# Altium PCB DEV-5V-Outside-Pump_2024-11-25.pcbdoc
Units mil, origin at the board's own origin, x right, y up, seen from the top; angles counter-clockwise.
Board outline 3260 x 4880 mil, 2 copper layers (Top Layer, Bottom Layer); 59 components, 45 nets, 268 pads, 27 vias.
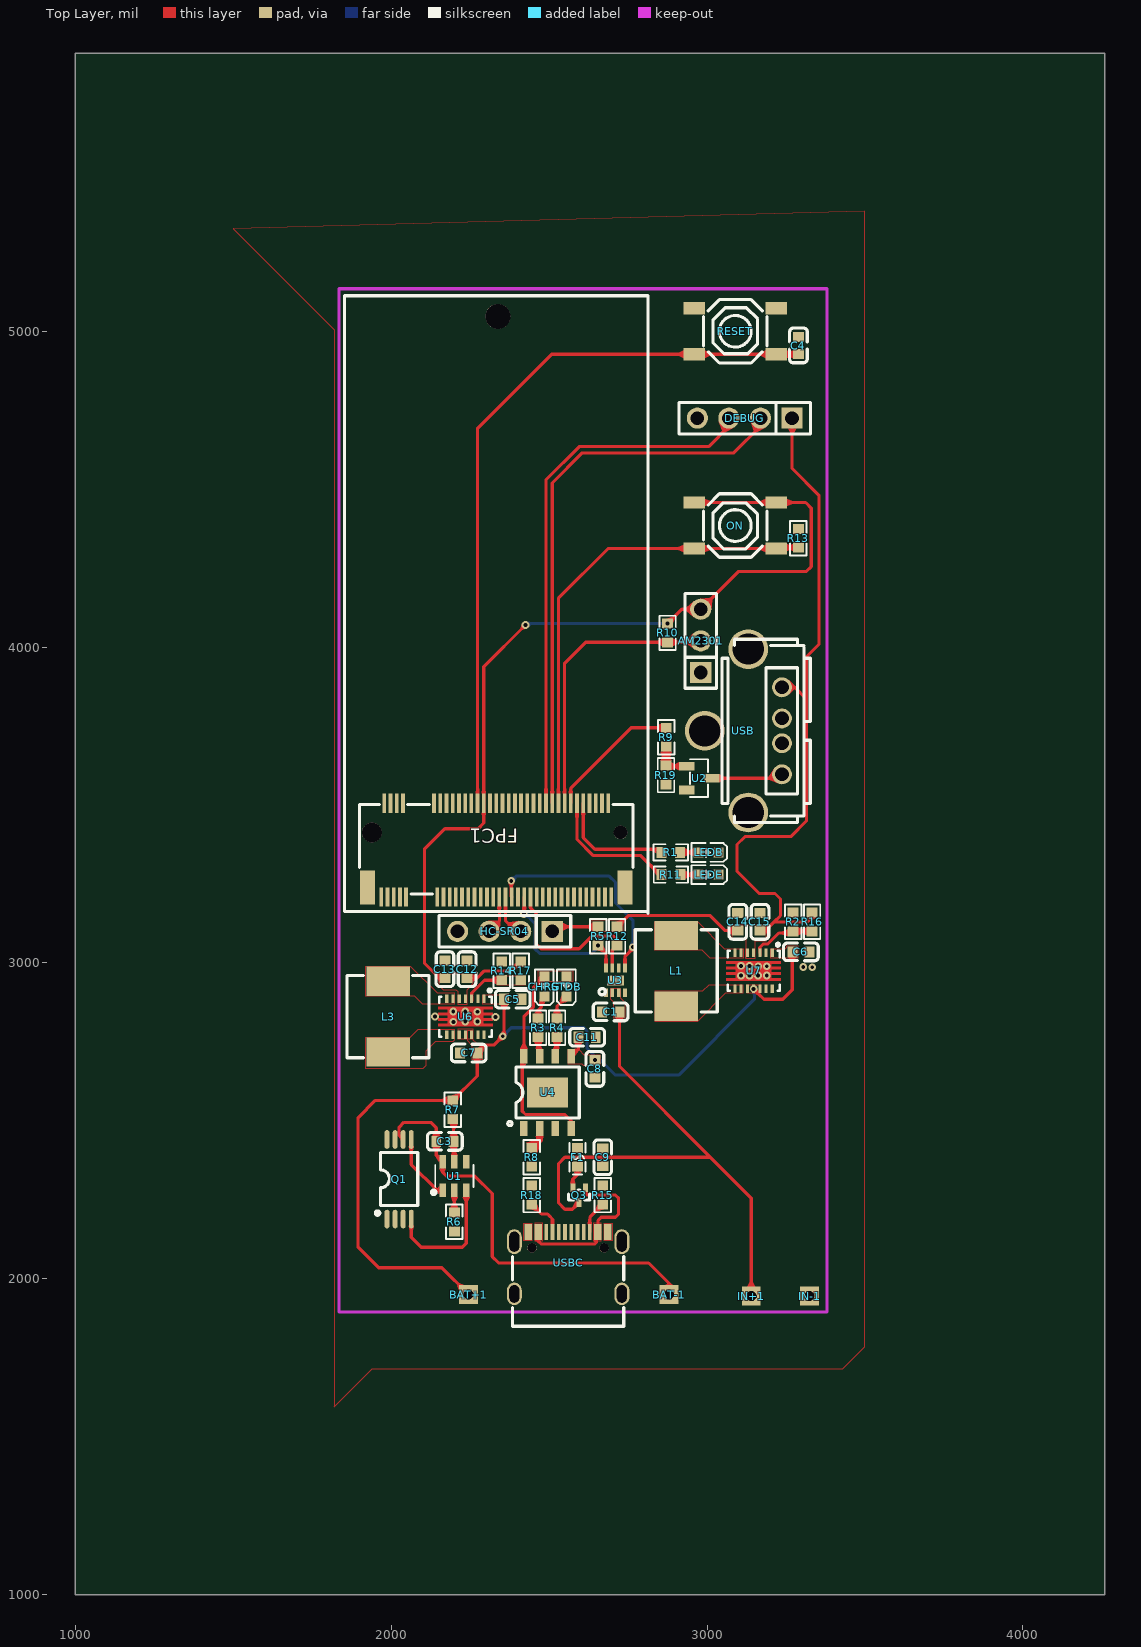
[diagram p0: Top Layer view]
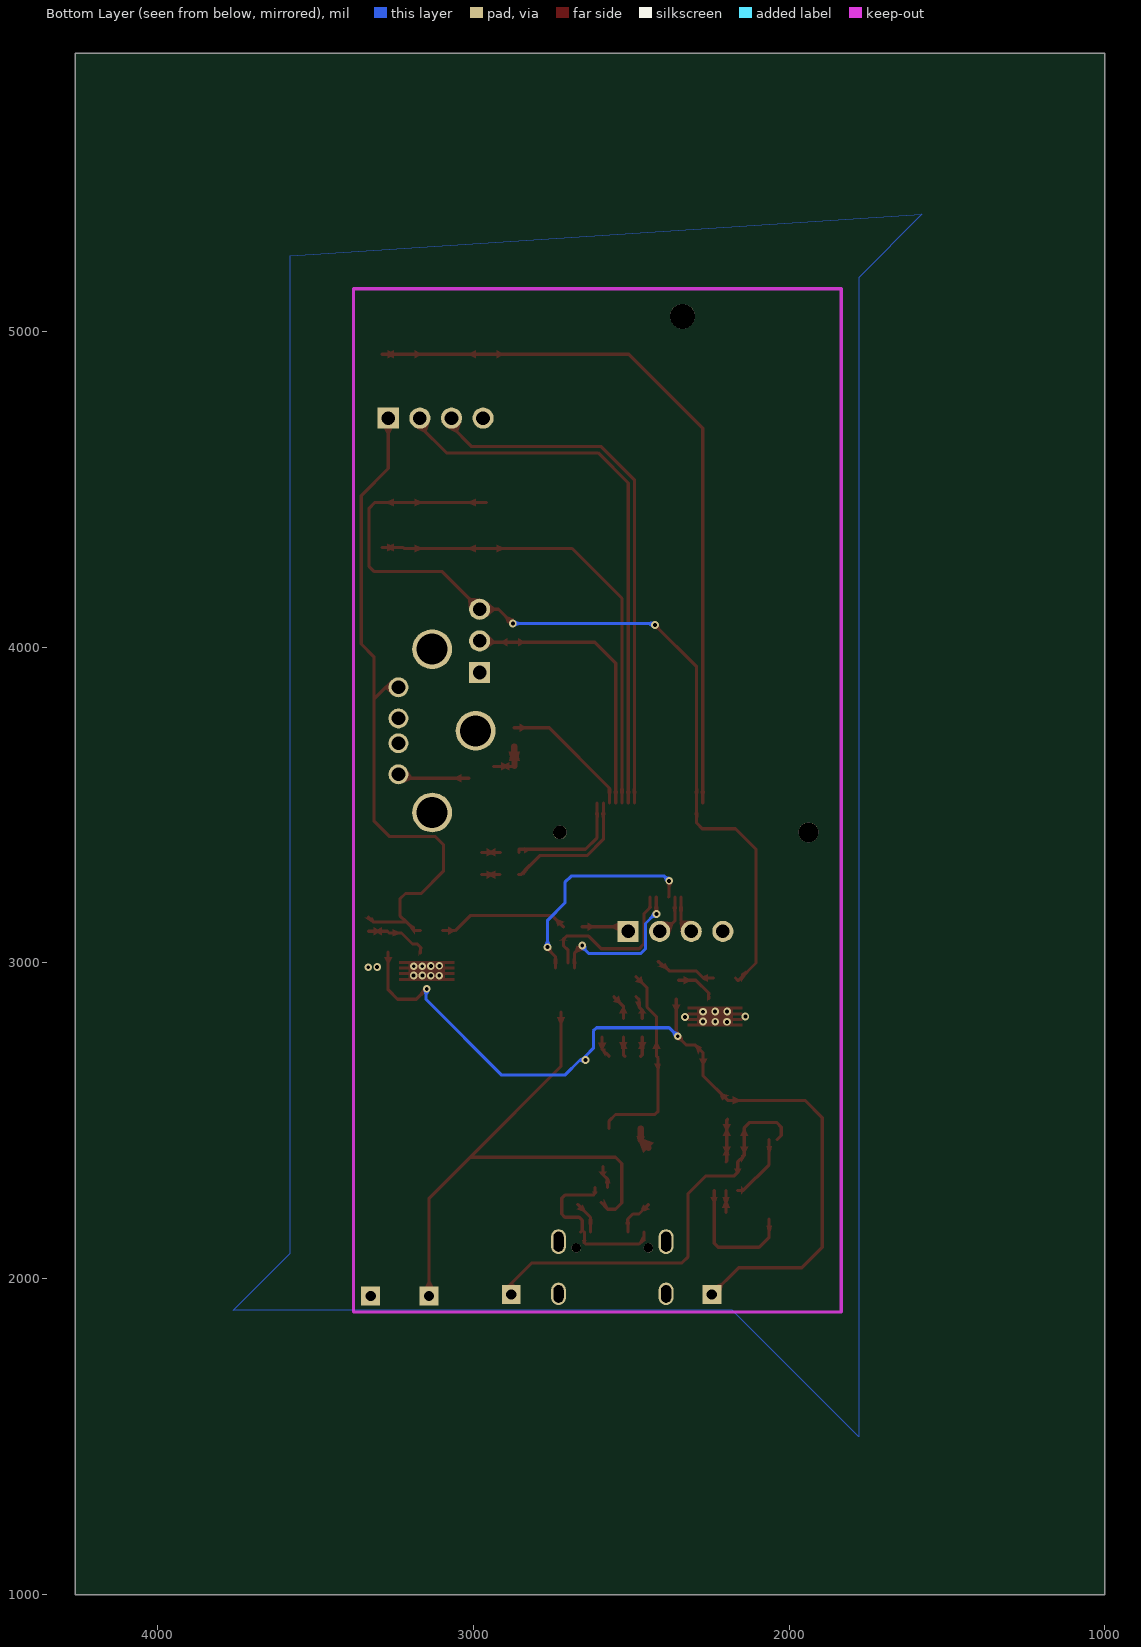
[diagram p1: Bottom Layer view, seen from below]

## Layer stack, top to bottom
Top Layer: signal copper (thickness not stored)
Dielectric: dielectric 12.6, FR-4, Dk 4.8
Bottom Layer: signal copper (thickness not stored)

## Board outline
4260,1000 1000,1000 1000,5880 4260,5880

## Components (designator, comment, footprint, x,y, rotation, side; value= is the part's Value field where it differs from the comment)
AM2301 "1125" CONN-TH_1125-1103S0S113CR01 2980,4020 r90 top
BAT+1 "Pad 04" CON_PAD_SQUARE_32MIL 2245,1950 r0 top
BAT-1 "Pad 05" CON_PAD_SQUARE_32MIL 2880,1950 r0 top
C1 "100n" C0603 2695,2845 r0 top
C3 "100n" C0603 2170,2435 r0 top
C4 "100n" C0603 3289.27,4955.11 r270 top
C5 "100n" C0603 2385,2885 r0 top
C6 "100n" C0603 3297.5,3035 r0 top
C7 "10u" C0603 2245,2715 r180 top
C8 "10u" C0603 2645,2665 r90 top
C9 "10u" C0603 2670,2385 r90 top
C11 "10uF" C0603 2620,2765 r180 top
C12 "22u" C0603 2240,2980 r270 top
C13 "22u" C0603 2170,2980 r270 top
C14 "22u" C0603 3097.5,3130 r270 top
C15 "22u" C0603 3167.5,3130 r270 top
CHRG "FC-DA1608BK-470H10" LED0603-RD 2485,2925 r90 top
DEBUG "2.54-1*4P母" HDR-TH_4P-P2.54-V-F 3119.27,4725.11 r180 top
F1 "1.25A" F0603 2590,2385 r90 top
FPC1 "AS0BC21-S30BM-7H" CONN-SMD_AS0BC21-S30BM-7H 2332.5,3357.5 r180 top
HC-SR04 "2.54-1*4P母" HDR-TH_4P-P2.54-V-F 2360,3100 r180 top
IN+1 "Pad 01" CON_PAD_SQUARE_32MIL 3140,1945 r0 top
IN-1 "Pad 02" CON_PAD_SQUARE_32MIL 3325,1945 r0 top
L1 "1.5u" IND-SMD_L7.2-W6.6_GPSR0730 2902.5,2975 r270 top
L3 "1.5uH" IND-SMD_L7.2-W6.6_GPSR0730 1990,2830 r270 top
LEDB "FC-DA1608BK-470H10" LED0603-RD 3005,3350 r180 top
LEDE "XL-1608UGC-04" LED0603-RD_GREEN 3005,3280 r180 top
ON "TS-1187A-B-A-B" SW-SMD_4P-L5.1-W5.1-P3.70-LS6.5-TL-2 3089.27,4385.11 r0 top
Q1 "FS8205A" TSSOP-8_L4.4-W3.5-P0.65-LS6.4-BL 2025,2315 r0 top
Q3 "NTA4151PT1G" SOT-416_L1.6-W0.8-P1.00-LS1.6-BR 2595,2265 r90 top
R1 "49.9" R0603 2885,3350 r180 top
R2 "180k" R0603 3272.5,3130 r270 top
R3 "1k" R0603 2465,2795 r270 top
R4 "1k" R0603 2525,2795 r270 top
R5 "10k" R0603 2655,3085 r90 top
R6 "1k" R0603 2200,2180 r270 top
R7 "100" R0603 2195,2535 r90 top
R8 "1.6k" R0603 2445,2385 r90 top
R9 "220" R0603 2870.73,3714.89 r270 top
R10 "10k" R0603 2875,4045 r90 top
R11 "49.9" R0603 2885.73,3279.89 r180 top
R12 "10k" R0603 2715,3085 r90 top
R13 "430" R0603 3289.27,4345.11 r270 top
R14 "180k" R0603 2350,2975 r270 top
R15 "5.1kΩ" R0603 2670,2265 r270 top
R16 "1.6M" R0603 3332.5,3130 r270 top
R17 "1M" R0603 2410,2975 r270 top
R18 "5.1kΩ" R0603 2445,2265 r270 top
R19 "10k" R0603 2870,3595 r90 top
RESET "TS-1187A-B-A-B" SW-SMD_4P-L5.1-W5.1-P3.70-LS6.5-TL-2 3089.27,5000.11 r180 top
STDB "FC-DA1608HRK-620D" LED0603-RD_RED 2555,2925 r90 top
U1 "DW01A" SOT-23-6_L2.9-W1.6-P0.95-LS2.8-BL 2200,2325 r0 top
U2 "IRLML6244TR" SOT-23-3_L2.9-W1.3-P1.90-LS2.4-BR 2975,3585 r180 top
U3 "MAX17048" DFN-8 2710,2945 r0 top
U4 "TP4056" ESOP-8_L4.9-W3.9-P1.27-LS6.0-BL-EP 2495,2590 r0 top
U6 "TPS63020DSJR" VSON-14_L4.0-W3.0-P0.50-BL-EP_TI_DSJ 2235,2830 r180 top
U7 "TPS63020DSJR" VSON-14_L4.0-W3.0-P0.50-BL-EP_TI_DSJ 3147.5,2975 r180 top
USB "UBAS-4R-D14D-4D(LF)(SN)" USB-A-TH_UBAS-4R-D14D-4D-LF-SN 3115,3735 r270 top
USBC "TYPE-C-31-M-12" USB-C_SMD-TYPE-C-31-M-12 2560,2050 r0 top

## Footprints (in the part's own frame and the unit in brackets; to place one, negate y for a bottom-side part, rotate by r counter-clockwise, add the part's x,y. Pads: shape width x height; smd on the part's side, far side on the other; paste and mask are expansions set on the pad)
C0603 [mm]
  rect 0.8x0.9 smd paste+0 mask+0.051: 1(-0.7,0) 2(0.7,0)
  silkscreen extent -1.41,-0.71 1.39,0.72
CON_PAD_SQUARE_32MIL [mil]
  rect 60x60 hole 32 paste+0 mask+2: P(0,0)
CONN-SMD_AS0BC21-S30BM-7H [mm]
  rect 0.3x1.55 smd paste+0 mask+0.05: 1(9.25,3.775) 2(9,-3.775) 3(8.75,3.775) 4(8.5,-3.775) 5(8.25,3.775) 6(8,-3.775) 7(7.75,3.775) 8(7.5,-3.775) 9(7.25,3.775) 18(5,-3.775) 19(4.75,3.775) 20(4.5,-3.775) 21(4.25,3.775) 22(4,-3.775) 23(3.75,3.775) 24(3.5,-3.775) 25(3.25,3.775) 26(3,-3.775) 27(2.75,3.775) 28(2.5,-3.775) 29(2.25,3.775) 30(2,-3.775) 31(1.75,3.775) 32(1.5,-3.775) 33(1.25,3.775) 34(1,-3.775) 35(0.75,3.775) 36(0.5,-3.775) 37(0.25,3.775) 38(0,-3.775) 39(-0.25,3.775) 40(-0.5,-3.775) 41(-0.75,3.775) 42(-1,-3.775) 43(-1.25,3.775) 44(-1.5,-3.775) 45(-1.75,3.775) 46(-2,-3.775) 47(-2.25,3.775) 48(-2.5,-3.775) 49(-2.75,3.775) 50(-3,-3.775) 51(-3.25,3.775) 52(-3.5,-3.775) 53(-3.75,3.775) 54(-4,-3.775) 55(-4.25,3.775) 56(-4.5,-3.775) 57(-4.75,3.775) 58(-5,-3.775) 59(-5.25,3.775) 60(-5.5,-3.775) 61(-5.75,3.775) 62(-6,-3.775) 63(-6.25,3.775) 64(-6.5,-3.775) 65(-6.75,3.775) 66(-7,-3.775) 67(-7.25,3.775) 68(-7.5,-3.775) 69(-7.75,3.775) 70(-8,-3.775) 71(-8.25,3.775) 72(-8.5,-3.775) 73(-8.75,3.775) 74(-9,-3.775) 75(-9.25,3.775)
  rect 1.2x2.75 smd paste+0 mask+0.05: 76(-10.35,3) 77(10.35,3)
  round 1.1 hole 1.1 unplated paste+0: ""(-10,-1.42)
  round 1.6 hole 1.6 unplated paste+0: ""(10,-1.42)
  silkscreen extent -11,-3.67 11,3.53
CONN-TH_1125-1103S0S113CR01 [mm]
  rect 1.7x1.7 hole 1.1 paste+0 mask+0.05: 1(-2.54,0)
  round 1.7 hole 1.1 paste+0 mask+0.05: 2(0,0) 3(2.54,0)
  silkscreen extent -3.81,-1.27 3.81,1.27
DFN-8 [mil]
  rect 11.8x27.6 smd paste+0 mask+2: P$1(-30,-39) P$2(-10,-39) P$3(10,-39) P$4(30,-39) P$5(30,39) P$6(10,39) P$7(-10,39) P$8(-30,39)
  rect 54.3x31.5 smd paste+0 mask+2: P$9(0,0)
  silkscreen extent -52,-46 -32,-26
ESOP-8_L4.9-W3.9-P1.27-LS6.0-BL-EP [mm]
  rect 0.6x1.2 smd paste+0 mask+0.051: 1(-1.905,-2.908) 2(-0.635,-2.908) 3(0.635,-2.908) 4(1.905,-2.908) 5(1.905,2.908) 6(0.635,2.908) 7(-0.635,2.908) 8(-1.905,2.908)
  rect 3.3x2.4 smd paste+0 mask+0.051: 9(0,0)
  silkscreen extent -3.2,-2.67 2.55,2.05
F0603 [mil]
  rect 31.75x34.02 smd paste-3937.01 mask+2: 1(-29.66,0) 2(29.66,0)
  silkscreen extent -55,-25 55,25
HDR-TH_4P-P2.54-V-F [mm]
  rect 1.7x1.7 hole 1.1 paste+0 mask+0.051: 1(-3.81,0)
  round 1.7 hole 1.1 paste+0 mask+0.051: 2(-1.27,0) 3(1.27,0) 4(3.81,0)
  silkscreen extent -5.29,-1.27 5.29,1.27
IND-SMD_L7.2-W6.6_GPSR0730 [mm]
  rect 2.35x3.5 smd paste+0 mask+0.051: 1(-2.85,0) 2(2.85,0)
  silkscreen extent -3.3,-3.3 3.3,3.3
LED0603-RD [mm]
  rect 0.8x0.8 smd paste+0 mask+0.051: 1(-0.799,-0.003) 2(0.799,0.004)
  silkscreen extent -1.49,-0.75 1.39,0.76
LED0603-RD_GREEN [mm]
  rect 0.8x0.8 smd paste+0 mask+0.051: 1(-0.799,-0.003) 2(0.799,0.004)
  silkscreen extent -1.49,-0.75 1.39,0.76
LED0603-RD_RED [mm]
  rect 0.8x0.8 smd paste+0 mask+0.051: 1(-0.799,-0.003) 2(0.799,0.004)
  silkscreen extent -1.49,-0.75 1.39,0.76
R0603 [mil]
  rect 31.75x34.02 smd paste-3937.01 mask+2: 1(-29.66,0) 2(29.66,0)
  silkscreen extent -55,-26 55,26
SOT-23-3_L2.9-W1.3-P1.90-LS2.4-BR [mm]
  rect 1.25x0.7 smd paste+0 mask+0.051: 1(1,-0.95) 2(1,0.95) 3(-1,0)
  silkscreen extent -0.73,-1.53 0.73,1.53
SOT-23-6_L2.9-W1.6-P0.95-LS2.8-BL [mm]
  rect 0.532x1.072 smd paste+0 mask+0.051: 1(-0.95,-1.149) 2(0,-1.149) 3(0.95,-1.149) 4(0.95,1.149) 5(0,1.149) 6(-0.95,1.149)
  silkscreen extent -1.82,-1.45 1.54,0.89
SOT-416_L1.6-W0.8-P1.00-LS1.6-BR [mm]
  rect 0.7x0.4 smd paste+0 mask+0.051: 1(0.6,-0.508) 2(0.6,0.508) 3(-0.6,0)
  silkscreen extent -0.4,-0.85 0.4,0.85
SW-SMD_4P-L5.1-W5.1-P3.70-LS6.5-TL-2 [mm]
  rect 1.7x1 smd paste+0 mask+0.051: 1(-3.3,1.85) 2(3.3,1.85) 3(-3.3,-1.85) 4(3.3,-1.85)
  silkscreen extent -2.55,-2.55 2.55,2.55
TSSOP-8_L4.4-W3.5-P0.65-LS6.4-BL [mm]
  oval 0.4x1.5 smd paste+0 mask+0.051: 1(-0.975,-3.2) 2(-0.325,-3.2) 3(0.325,-3.2) 4(0.975,-3.2) 5(0.975,3.2) 6(0.325,3.2) 7(-0.325,3.2) 8(-0.975,3.2)
  silkscreen extent -1.89,-2.87 1.5,2.16
USB-A-TH_UBAS-4R-D14D-4D-LF-SN [mm]
  round 1.6 hole 1.1 paste+0 mask+0.051: 1(-3.5,3.105) 2(-1,3.105) 3(1,3.105) 4(3.5,3.105)
  round 3.2 hole 2.5 paste+0 mask+0.051: 5(-6.57,0.395) 6(6.57,0.395) 7(0,-3.105)
  silkscreen extent -7.37,-1.73 7.37,5.38
USB-C_SMD-TYPE-C-31-M-12 [mm]
  oval 1.2x2 hole 0.8 slot 1.6 at 90 deg paste+0 mask+0.051: 0(-4.325,1.716) 1(4.325,1.716)
  oval 1.2x1.8 hole 0.8 slot 1.4 at 90 deg paste+0 mask+0.051: 2(4.325,-2.484) 3(-4.325,-2.484)
  rect 0.3x1.3 smd paste-100 mask+0.051: A1(-3.35,2.484) A4(-2.55,2.484) A5(-1.25,2.484) A6(-0.25,2.484) A7(0.25,2.484) A8(1.25,2.484) A9(2.55,2.484) A12(3.35,2.484) B1(3.05,2.484) B4(2.25,2.484) B5(1.75,2.484) B6(0.75,2.484) B7(-0.75,2.484) B8(-1.75,2.484) B9(-2.25,2.484) B12(-3.05,2.484)
  round 0.75 hole 0.75 unplated paste+0: ""(-2.9,1.216) ""(2.9,1.216)
  silkscreen extent -4.47,-5.08 4.47,0.5
VSON-14_L4.0-W3.0-P0.50-BL-EP_TI_DSJ [mm]
  rect 0.25x0.7 smd paste+0 mask+0.051: 1(-1.5,-1.45) 2(-1,-1.45) 3(-0.5,-1.45) 4(0,-1.45) 5(0.5,-1.45) 6(1,-1.45) 7(1.5,-1.45) 8(1.5,1.45) 9(1,1.45) 10(0.5,1.45) 11(0,1.45) 12(-0.5,1.45) 13(-1,1.45) 14(-1.5,1.45)
  Top Layer region: -2.2,0.79 -2.2,0.59 -1.43,0.59 -1.43,0.33 -2.2,0.33 -2.2,0.13 -1.43,0.13 -1.43,-0.13 -2.2,-0.13 -2.2,-0.33 -1.43,-0.33 -1.43,-0.59 -2.2,-0.59 -2.2,-0.79 2.2,-0.79 2.2,-0.59 1.43,-0.59 1.43,-0.33 2.2,-0.33 2.2,-0.13 1.43,-0.13 1.43,0.13 2.2,0.13 2.2,0.33 1.43,0.33 1.43,0.59 2.2,0.59 2.2,0.79
  silkscreen extent -2.1,-2.23 2.1,1.6

## Free pads (board coordinates)
  round 78.74 hole 78.74 unplated paste+0: ""(2337.5,5047.5)

## Via types
v1: diameter 24.41, hole 12.2, Top Layer to Bottom Layer, tented both sides, 27 vias

## Nets (pads, with @x,y where several pads share a name; then routed paths per layer and width w, separated by ;. In a path a pad name is that pad's centre, name@x,y a point inside that pad or via, vN(x,y) a via of type N, cw(c..) or ccw(c..) an arc to the next point about the centre after c; other vN are vias at no path point)
+3V3: AM2301.3 C12.2 C13.2 FPC1.34 ON.1 ON.2 R10.2 R17.1 U6.4 U6.5 | length 3094.8
  Top Layer w10: C13.2 2162.56,2945 2160,2945 2105,3000 2105,3360 2170,3425 2275,3425 2293.13,3443.13 FPC1.34 2293.13,3938.13 v1(2425,4070) ; C12.2 2272.4,2952.4 2295,2975 2380.3,2975 2385,2980 R17.1@2414.66,3004.66 ; v1(2875,4074.66) 2920.34,4120 AM2301.3 3100,4240 3315,4240 3330,4255 3330,4440 3312.1,4457.9 ON.2@3219.2,4457.9 ; ON.1 ON.2
  Bottom Layer w10: v1(2425,4070) 2430,4075 2795,4075 v1(2875,4074.66)
+5V: C14.2 C15.2 DEBUG.1 HC-SR04.1 R5.2 R12.2 R16.1 U7.4 U7.5 USB.1 | length 2761.8
  Top Layer w10: HC-SR04.1 2524.66,3114.66 R5.2 ; R12.2 2750.3,3150 3010,3150 3057.6,3102.4 C14.2 ; C15.2 3184.94,3102.44 3212.5,3130 ; USB.1 3277.2,3872.8 3315,3835 ; DEBUG.1 3269.27,4565.73 3355,4480 3355,4010 3315,3970 3315,3835 ; R16.1@3332.5,3145 3317.5,3130 3212.5,3130 ; 3212.5,3130 3232.5,3150 3232.5,3202.5 3215,3220 3165,3220 3095,3290 3095,3375 3120,3400 3265,3400 3315,3450 3315,3835
AM: AM2301.2 FPC1.60 R10.1 | length 903.3
  Top Layer w10: FPC1.60 2549.03,3949.03 2615.35,4015.35 2875,4015.35 2975.35,4015.35 AM2301.2
BATT_ALERT: FPC1.43 U3.P$5 | length 700.5
  Top Layer w10: v1(2380,3260) 2380,3210.59 FPC1.43 ; U3.P$5 2740,3020 2765,3045 v1(2765,3050)
  Bottom Layer w10: v1(2380,3260) 2395,3275 2690,3275 2710,3255 2710,3190 2765,3135 v1(2765,3050)
C3_1: BAT-1.P C3.1 Q1.6 Q1.7 U1.6 | length 1339.2
  Top Layer w10: Q1.6 2025,2453.8 2025,2480 2040,2495 2125,2495 2142.4,2477.6 C3.1 ; C3.1 2142.44,2390.4 U1.6 ; U1.6 2162.6,2337.4 2175,2325 2265,2325 2320,2270 2320,2070 2340,2050 2815,2050 2880,1985 BAT-1.P
C3_2: C3.2 R7.1 U1.5 | length 137.2
  Top Layer w10: R7.1 2197.56,2502.78 C3.2 2197.56,2372.68 U1.5
C9_2: C9.2 CHRG.2 F1.2 STDB.2 U4.4 U4.8 | length 647.3
  Top Layer w10: CHRG.2 2450,2921.61 2450,2860 2420,2830 U4.8 2415,2699.5 2415,2530 2425,2520 2550,2520 2570,2500 U4.4
CC1: R18.2 USBC.A5 | length 126.3
  Top Layer w10: R18.2 2475.34,2205 2495,2205 2500.86,2199.14 2510.79,2189.21 USBC.A5
CC2: R15.2 USBC.B5 | length 104.6
  Top Layer w10: USBC.B5 2628.9,2194.24 R15.2
ECHO: FPC1.39 HC-SR04.3 | length 122.3
  Top Layer w10: HC-SR04.3 2342.34,3132.34 FPC1.39
EN: C4.2 FPC1.32 RESET.1 RESET.2 | length 2299.9
  Top Layer w10: FPC1.32 2273.4,4693 2507.7,4927.3 RESET.2 ; RESET.2 RESET.1 ; RESET.1 C4.2@3289.3,4927.5
F1_1: F1.1 Q3.2 | length 72.9
  Top Layer w10: Q3.2 2575,2315 2590,2330 F1.1
GND: AM2301.1 C1.1 C4.1 C5.2 C6.2 C7.2 C8.1 C9.1 C11.1 C12.1 C13.1 C14.1 C15.1 DEBUG.4 FPC1.23 HC-SR04.4 IN-1.P LEDB.1 LEDE.1 Q1.2 Q1.3 R2.1 R6.2 R8.1 R13.1 R14.1 R15.1 R18.1 R19.1 RESET.3 RESET.4 U2.2 U3.P$1 U3.P$4 U3.P$6 U3.P$9 U4.1 U4.3 U6.2 U6.13 U7.2 U7.13 USBC.0 USBC.1 USBC.2 USBC.3 USBC.A1 USBC.A12 USBC.B1 USBC.B12
  other v1: 2196.67,2813.52 2234.25,2814.22 2272.78,2814.63 2330.07,2829.07 2138.65,2830.3 2196.3,2846.3 2234.44,2846.48 2272.6,2845.56 3107.83,2959.89 3134.5,2959.89 3161.35,2960.26 3189.13,2960.07 3332.98,2986.43 3304.64,2987.22 3134.5,2990.44 3161.72,2989.7 3188.94,2989.51 3107.64,2990.81
GPIO38: FPC1.66 R1.2 | length 381.7
  Top Layer w10: FPC1.66 2608.1,3396.9 2645,3360 2855.3,3360 R1.2
GPIO39: FPC1.64 R11.2 | length 428.5
  Top Layer w10: FPC1.64 2588.4,3391.6 2640,3340 2790,3340 2850.1,3279.9 R11.2
LEDB_2: LEDB.2 R1.1 | length 58.8
  Top Layer w10: R1.1 LEDB.2
LEDE_2: LEDE.2 R11.1 | length 58.1
  Top Layer w10: R11.1 LEDE.2
OC: Q1.4 U1.3 | length 417
  Top Layer w10: Q1.4 2063.41,2131.59 2095,2100 2225,2100 2237.4,2112.4 U1.3
OD: Q1.5 U1.1 | length 212.5
  Top Layer w10: Q1.5 2063.4,2361.6 2145.2,2279.8 U1.1
P+: C1.2 IN+1.P Q3.3 U3.P$2 U3.P$3 | length 1768.3
  Top Layer w10: Q3.3 2573.62,2220 2550,2220 2530,2240 2530,2365 2550,2385 3010,2385 ; C1.2 2722.6,2672.4 3010,2385 ; IN+1.P 3140,2255 3010,2385
PUMP: FPC1.58 ON.3 ON.4 R13.2 | length 1474.9
  Top Layer w10: FPC1.58@2529.35,3506.12 2529.35,4154.35 2687.27,4312.27 ON.3 ON.4 3222.38,4315.46 R13.2
R3_1: CHRG.1 R3.1 | length 77.2
  Top Layer w10: R3.1 2465,2850 2475,2860 2475,2883.38 CHRG.1
R3_2: R3.2 U4.7 | length 62.9
  Top Layer w10: R3.2 2465,2709.5 U4.7
R6_1: R6.1 U1.2 | length 70.1
  Top Layer w10: R6.1 U1.2
R8_2: R8.2 U4.2 | length 71.2
  Top Layer w19.68: R8.2 2470,2439.66 U4.2
S$22309: 
S$63455: 
SCL: FPC1.49 R12.1 U3.P$7 | length 520
  Top Layer w10: FPC1.49 2440.76,3174.24 2460,3155 2460,3060 2475,3045 2595,3045 2635,3085 2705,3085 2715,3075 R12.1 2700,3040.34 2700,3000
SDA: FPC1.47 R5.1 U3.P$8 | length 483.3
  Top Layer w10: v1(2420,3155) 2421.08,3156.08 FPC1.47 ; v1(2655,3055.34) 2680,3030.34 U3.P$8
  Bottom Layer w10: v1(2420,3155) 2425,3155 2455,3125 2455,3045 2470,3030 2635,3030 2655,3050 v1(2655,3055.34)
STDB_1: R4.1 STDB.1 | length 81.3
  Top Layer w10: R4.1 2525,2863.38 STDB.1
TRIG: FPC1.41 HC-SR04.2 | length 137.6
  Top Layer w10: FPC1.41 2362,3133 2395,3100 HC-SR04.2
U0RXD: DEBUG.2 FPC1.56 | length 1773.4
  Top Layer w10: FPC1.56 2509.7,4519.7 2605,4615 3085,4615 3169.3,4699.3 DEBUG.2
U0TXD: DEBUG.3 FPC1.54 | length 1699.1
  Top Layer w10: FPC1.54 2490,4530 2595,4635 3005,4635 3069.3,4699.3 DEBUG.3
U2_1: R9.2 R19.2 U2.1 | length 127.1
  Top Layer w10: R19.2 2872.26,3622.4 U2.1
  Top Layer w19.68: R19.2 R9.2
U4_6: R4.2 U4.6 | length 62.9
  Top Layer w10: U4.6 2525,2709.5 R4.2
U6_3: R14.2 R17.2 U6.3 | length 129.6
  Top Layer w10: U6.3 2255,2905 2295.34,2945.34 R14.2
U6_6: L3.1 U6.6 U6.7
U6_8: L3.2 U6.8 U6.9
U7_3: R2.2 R16.2 U7.3 | length 203.7
  Top Layer w10: U7.3 3167.5,3050 3177.5,3060 3192.5,3060 3227.5,3095 3267.2,3095 R2.2 ; R2.2 R16.2
U7_6: L1.1 U7.6 U7.7
U7_8: L1.2 U7.8 U7.9
USB_4: U2.3 USB.4 | length 227.9
  Top Layer w10: U2.3 3225.04,3585 USB.4
USB_5V: Q3.1 USBC.A4 USBC.A9 USBC.B4 USBC.B9 | length 547.2
  Top Layer w10: USBC.A4 2459.61,2125.39 2475,2110 2645,2110 2650,2115 2648.58,2116.42 USBC.B4 ; Q3.1 2615,2270 2620,2265 2710,2265 2720,2255 2720,2205 2710,2195 2665,2195 2655,2185 2655,2153.2 USBC.A9
VBAT: BAT+1.P C5.1 C6.1 C7.1 C8.2 C11.2 R7.2 U4.5 U6.1 U6.10 U6.11 U6.12 U7.1 U7.10 U7.11 U7.12 | length 2930
  Top Layer w10: BAT+1.P 2160,2035 1960,2035 1895,2100 1895,2510 1949.66,2564.66 R7.2 2272.56,2642.22 C7.1 ; C7.1 2297.6,2740 2325,2740 v1(2352.97,2767.96) 2357.4,2772.4 C5.1 ; U4.5 2592.44,2726.94 C11.2 ; v1(3147.5,2917.91) 3180.4,2885 3240,2885 3269.9,2914.9 C6.1
  Bottom Layer w10: v1(2352.97,2767.96) 2380,2795 2610,2795 2620,2785 2620,2730 2645,2705 v1(2645,2692.56) ; v1(2645,2692.56) 2662.4,2692.6 2710,2645 2910,2645 3150,2885 3150,2915.4 v1(3147.5,2917.91)
WTR: FPC1.62 R9.1 | length 428.7
  Top Layer w10: FPC1.62 2568.7,3553.7 2759.54,3744.54 R9.1
pads on no net: FPC1. FPC1.1 FPC1.2 FPC1.3 FPC1.4 FPC1.5 FPC1.6 FPC1.7 FPC1.8 FPC1.9 FPC1.18 FPC1.19 FPC1.20 FPC1.21 FPC1.22 FPC1.24 FPC1.25 FPC1.26 FPC1.27 FPC1.28 FPC1.29 FPC1.30 FPC1.31 FPC1.33 FPC1.35 FPC1.36 FPC1.37 FPC1.38 FPC1.40 FPC1.42 FPC1.44 FPC1.45 FPC1.46 FPC1.48 FPC1.50 FPC1.51 FPC1.52 FPC1.53 FPC1.55 FPC1.57 FPC1.59 FPC1.61 FPC1.63 FPC1.65 FPC1.67 FPC1.68 FPC1.69 FPC1.70 FPC1.71 FPC1.72 FPC1.73 FPC1.74 FPC1.75 FPC1.76 FPC1.77 Q1.1 Q1.8 U1.4 U4.9 U6.14 U7.14 USB.2 USB.3 USB.5 USB.6 USB.7 USBC. USBC.A6 USBC.A7 USBC.A8 USBC.B6 USBC.B7 USBC.B8

## Polygon pours and split planes (outlines as drawn)
GND on Bottom Layer (solid): 1580,5370 1780,5170 1780,1500 2180,1900 3760,1900 3580,2080 3580,5240
+3V3 on Top Layer (solid): 2210,2870 2240,2870 2240,2910 2240,2915 2245,2920 2250,2925 2260,2935 2260,2960 2260,2965 2255,2965 2155,2965 2150,2965 2150,2960 2150,2930 2155,2925 2160,2920 2165,2915 2200,2915 2205,2915 2210,2910 2210,2870
+5V on Top Layer (solid): 3122.5,3045 3122.5,3015 3152.5,3015 3152.5,3070 3162.5,3070 3177.5,3070 3187.5,3070 3187.5,3120 3077.5,3120 3077.5,3075 3122.5,3075 3122.5,3030 3122.5,3015
VBAT on Top Layer (solid): 3202.5,3045 3247.5,3045 3252.5,3050 3252.5,3055 3287.5,3055 3287.5,3015 3252.5,3015 3247.5,3015 3242.5,3015 3202.5,3015 3202.5,3045
C9_2 on Top Layer (solid): 2575,2975 2575,2940 2465,2940 2465,2975
+5V on Top Layer (solid): 2635,3135 2635,3100 2735,3100 2735,3135
USB_5V on Top Layer (solid): 2455,2175 2455,2120 2480,2120 2480,2175
GND on Top Layer (solid): 2420,2175 2445,2175 2445,2120 2420,2120
GND on Top Layer (solid): 2675,2175 2700,2175 2700,2120 2675,2120
USB_5V on Top Layer (solid): 2640,2175 2640,2120 2665,2120 2665,2175
C9_2 on Top Layer (solid): 2555,2500 2555,2450 2570,2435 2570,2425 2570,2400 2575,2400 2690,2400 2690,2435 2590,2435 2585,2440 2585,2450 2585,2500
U6_6 on Top Layer (solid): 1920,2990 2060,2990 2145,2905 2200,2905 2200,2870 2170,2870 2145,2870 2100,2870 2075,2895 2070,2895 1920,2895 1920,2990
U6_8 on Top Layer (solid): 1920,2765 2060,2765 2085,2790 2200,2790 2200,2755 2195,2750 2140,2750 2110,2720 2110,2675 2100,2665 1920,2665
P+ on Top Layer (solid): 2695,2920 2710,2920 2725,2920 2725,2890 2730,2885 2740,2875 2740,2860 2740,2845 2740,2825 2705,2825 2705,2875 2695,2885 2695,2890 2695,2920
C3_1 on Top Layer (solid): 2005,2470 2005,2415 2045,2415 2045,2470
VBAT on Top Layer (solid): 2560,2725 2595,2725 2610,2710 2625,2710 2660,2710 2660,2675 2610,2675 2605,2680 2595,2680 2560,2680
U6_3 on Top Layer (solid): 2335,2960 2425,2960 2425,2930 2335,2930
VBAT on Top Layer (solid): 2210,2790 2210,2760 2260,2760 2260,2790
VBAT on Top Layer (solid): 2240,2785 2240,2755 2255,2740 2255,2735 2255,2695 2290,2695 2290,2735 2270,2745 2260,2755 2260,2785
VBAT on Top Layer (solid): 2290,2900 2370,2900 2370,2870 2290,2870
U7_6 on Top Layer (solid): 2835,3130 2970,3130 3055,3045 3115,3045 3115,3015 3055,3015 3010,3015 2985,3040 2965,3040 2835,3040
U7_8 on Top Layer (solid): 2835,2910 2835,2815 2970,2815 3060,2905 3080,2905 3115,2905 3115,2930 3005,2930 2985,2910 2975,2910 2835,2910
VBAT on Top Layer (solid): 3125,2930 3125,2905 3170,2905 3170,2930
GND on Top Layer (solid): 1500,5325 1820,5005 1820,1595 1940,1715 3430,1715 3500,1785 3500,5380

## Other copper
Top Layer:
  region net OD: 2071.28,2419.34 2055.53,2419.35 2058.4,2404.35 2068.4,2404.34
  region net OC: 2071.28,2167.35 2055.53,2167.35 2058.41,2152.35 2068.41,2152.35
  region net GPIO38: 2602.18,3475.61 2613.99,3475.61 2613.1,3460.61 2603.1,3460.61
  region net GPIO39: 2582.5,3475.61 2594.31,3475.61 2593.4,3460.61 2583.4,3460.61
  region net WTR: 2574.62,3536.63 2562.81,3536.63 2563.7,3551.63 2573.7,3551.63
  region net AM: 2554.94,3536.63 2543.12,3536.63 2544.03,3551.63 2554.03,3551.63
  region net PUMP: 2535.25,3536.63 2523.44,3536.63 2524.35,3551.63 2534.35,3551.63
  region net U0RXD: 2515.57,3536.63 2503.75,3536.63 2504.7,3551.63 2514.7,3551.63
  region net U0TXD: 2495.88,3536.63 2484.07,3536.63 2485,3551.63 2495,3551.63
  region net SCL: 2434.86,3178.36 2446.67,3178.36 2445.76,3174.24 2435.76,3174.24
  region net SDA: 2415.17,3178.36 2426.98,3178.36 2426.08,3163.36 2416.08,3163.36
  region net TRIG: 2356.12,3178.36 2367.93,3178.36 2367,3163.36 2357,3163.36
  region net ECHO: 2336.43,3178.36 2348.24,3178.36 2347.34,3163.36 2337.34,3163.36
  region net +3V3: 2299.03,3536.63 2287.22,3536.63 2288.13,3551.63 2298.13,3551.63
  region net +3V3: 2287.22,3475.61 2299.03,3475.61 2298.13,3460.61 2288.13,3460.61
  region net EN: 2279.35,3536.63 2267.53,3536.63 2268.4,3551.63 2278.4,3551.63
  region net USB_5V: 2654.49,2122.21 2642.68,2122.21 2643.58,2116.42 2653.58,2116.42
  region net USB_5V: 2465.51,2132.36 2453.7,2122.21 2465.42,2112.5 2473.03,2119.04
  region net CC2: 2622.99,2173.39 2634.8,2173.39 2633.9,2188.39 2623.9,2188.39
  region net CC1: 2504.88,2173.39 2516.69,2173.39 2515.79,2188.39 2505.79,2188.39
  region net VBAT: 3152.42,2925.48 3152.42,2904.13 3167.42,2890.91 3167.42,2905.05
  region net U7_3: 3162.26,3045.87 3172.1,3023.37 3172.32,3038.98 3162.5,3050.08
  region net U6_3: 2249.76,2900.87 2259.6,2878.8 2259.81,2894.22 2250,2905.09
  region net C9_2: 2427.5,2680.88 2408.19,2680.88 2410,2665.88 2420,2665.88
  region net C9_2: 2408.19,2728.12 2431.81,2728.12 2425,2743.12 2415,2743.12
  region net R3_2: 2458.19,2728.12 2477.5,2728.12 2470,2743.12 2460,2743.12
  region net U4_6: 2512.5,2728.12 2531.81,2728.12 2530,2743.12 2520,2743.12
  region net VBAT: 2581.81,2728.12 2581.81,2703.81 2592.44,2719.87 2588.91,2730.48
  region net R8_2: 2481.81,2451.88 2458.19,2451.88 2460.16,2439.66 2479.84,2439.66
  region net SDA: 2674.1,2997.8 2685.9,2997.8 2685,3012.8 2675,3012.8
  region net BATT_ALERT: 2734.1,2997.8 2745.9,2997.8 2745,3012.8 2735,3012.8
  region net USB_4: 3038.97,3597.5 3038.97,3572.5 3053.97,3580 3053.97,3590
  region net U2_1: 2911.03,3609.9 2911.03,3634.9 2896.03,3627.4 2896.03,3617.4
  region net C3_1: 2173.07,2349.14 2152.13,2349.14 2157.6,2337.4 2167.6,2337.4
  region net C3_1: 2152.13,2368.21 2152.13,2391.34 2145.98,2393.94 2142.44,2383.33
  region net C3_2: 2189.53,2391.34 2210.06,2391.34 2202.56,2406.34 2192.56,2406.34
  region net OC: 2247.87,2258.66 2226.93,2258.66 2232.4,2243.66 2242.4,2243.66
  region net R6_1: 2210.47,2258.66 2189.53,2258.66 2195,2243.66 2205,2243.66
  region net OD: 2152.13,2267.3 2152.13,2292.3 2145.2,2284.8 2145.2,2274.8
  region net STDB_1: 2557.08,2877.77 2539.39,2895.44 2534.09,2879.54 2541.16,2872.47
  region net EN: 2992.82,4939.77 2992.82,4914.77 3007.82,4922.27 3007.82,4932.27
  region net EN: 2925.88,4914.8 2925.88,4939.8 2910.88,4932.3 2910.88,4922.3
  region net EN: 3252.66,4939.9 3252.66,4914.9 3267.66,4922.44 3267.66,4932.44
  region net EN: 3185.73,4914.77 3185.73,4939.77 3170.73,4932.27 3170.73,4922.27
  region net U2_1: 2852.99,3640.53 2887.01,3640.53 2880.37,3670.06 2860.68,3670.06
  region net U2_1: 2887.01,3634.9 2887.01,3609.9 2902.01,3617.4 2902.01,3627.4
  region net CC1: 2462.01,2234.12 2441.75,2219.47 2459.49,2213.78 2467.69,2219.72
  region net +3V3: 2416.04,2988.78 2392.99,2998.47 2384.25,2985.88 2394.64,2981.51
  region net +5V: 3318.78,3143.78 3343.78,3143.78 3324.57,3130 3313.96,3133.54
  region net U7_3: 3315.49,3087.84 3315.49,3112.84 3300.49,3105.34 3300.49,3095.34
  region net CC2: 2673.25,2219.47 2652.99,2234.12 2647.31,2219.72 2655.52,2213.78
  region net U6_3: 2332.99,2932.84 2332.99,2957.84 2317.99,2950.34 2317.99,2940.34
  region net PUMP: 3272.27,4302.96 3272.27,4327.96 3257.27,4320.46 3257.27,4310.46
  region net SCL: 2727.5,3071.22 2702.5,3071.22 2710,3075 2720,3075
  region net +5V: 2711.67,3130.53 2732.01,3116 2737.72,3130.35 2729.47,3136.24
  region net LEDE_2: 2931.26,3267.4 2931.26,3292.4 2946.26,3284.9 2946.26,3274.9
  region net GPIO39: 2840.2,3277.3 2840.2,3296.9 2825.2,3311.87 2825.2,3297.73
  region net AM: 2857.99,4027.85 2857.99,4002.85 2842.99,4010.35 2842.99,4020.35
  region net AM: 2892.01,4002.85 2892.01,4027.85 2907.01,4020.35 2907.01,4010.35
  region net +3V3: 2871.75,4090.53 2892.01,4075.88 2897.69,4090.28 2889.48,4096.22
  region net WTR: 2853.72,3757.04 2853.72,3732.04 2838.72,3739.54 2838.72,3749.54
  region net U2_1: 2887.73,3669.36 2853.72,3669.36 2860.33,3639.83 2880.02,3639.83
  region net R8_2: 2427.99,2430.53 2462.01,2398.78 2473.09,2428.83 2458.69,2442.27
  region net C3_2: 2185.06,2489.47 2210.06,2489.47 2202.56,2474.47 2192.56,2474.47
  region net VBAT: 2177.99,2552.16 2177.99,2577.16 2162.99,2569.66 2162.99,2559.66
  region net VBAT: 2191.75,2580.53 2212.01,2565.88 2217.69,2580.28 2209.48,2586.22
  region net R6_1: 2212.5,2225.53 2187.5,2225.53 2195,2240.53 2205,2240.53
  region net SDA: 2672.01,3054.12 2651.75,3039.47 2669.48,3033.78 2677.69,3039.72
  region net +5V: 2637.99,3102.16 2637.99,3127.16 2622.99,3119.66 2622.99,3109.66
  region net STDB_1: 2537.5,2840.53 2512.5,2840.53 2520,2855.53 2530,2855.53
  region net U4_6: 2537.5,2749.47 2512.5,2749.47 2520,2734.47 2530,2734.47
  region net R3_1: 2477.5,2840.53 2452.5,2840.53 2460,2850 2470,2850
  region net R3_2: 2477.5,2749.47 2452.5,2749.47 2460,2734.47 2470,2734.47
  region net U7_3: 3289.51,3112.84 3289.51,3087.84 3304.51,3095.34 3304.51,3105.34
  region net U7_3: 3255.49,3084.47 3255.49,3107.5 3240.49,3100 3240.49,3090
  region net LEDB_2: 2930.53,3337.47 2930.53,3362.47 2945.53,3354.95 2945.53,3344.95
  region net GPIO38: 2839.47,3347.5 2839.47,3367.01 2824.47,3365 2824.47,3355
  region net P+: 2589.35,2227.6 2587.13,2252.5 2574.28,2227.73 2575.44,2214.75
  region net F1_1: 2567.13,2302.4 2582.87,2302.4 2580,2315 2570,2315
  region net USB_5V: 2622.87,2274.84 2607.13,2274.84 2610,2270 2620,2270
  region net PUMP: 3252.66,4327.96 3252.66,4302.96 3267.66,4310.46 3267.66,4320.46
  region net PUMP: 3185.73,4299.77 3185.73,4324.77 3170.73,4317.27 3170.73,4307.27
  region net PUMP: 2992.82,4324.77 2992.82,4299.77 3007.82,4307.27 3007.82,4317.27
  region net PUMP: 2925.88,4299.77 2925.88,4324.77 2910.88,4317.27 2910.88,4307.27
  region net +3V3: 3252.66,4470.4 3252.66,4445.4 3267.66,4452.9 3267.66,4462.9
  region net +3V3: 3185.73,4445.45 3185.73,4470.45 3170.73,4462.95 3170.73,4452.95
  region net +3V3: 2992.82,4470.45 2992.82,4445.45 3007.82,4452.95 3007.82,4462.95
  region net LEDE_2: 2957.78,3267.4 2957.78,3292.4 2942.78,3284.9 2942.78,3274.9
  region net LEDB_2: 2957.78,3337.43 2957.78,3362.43 2942.78,3354.95 2942.78,3344.95
  region net P+: 3127.5,1975 3152.5,1975 3145,1990 3135,1990
  region net F1_1: 2577.5,2339.47 2602.5,2339.47 2595,2330 2585,2330
  region net +5V: 3281.77,4691.65 3256.77,4691.65 3264.27,4676.65 3274.27,4676.65
  region net R3_1: 2487.5,2877.77 2469.39,2877.77 2470,2862.77 2480,2862.77
  region net C9_2: 2486.8,2940.73 2469.11,2958.39 2463.81,2942.49 2470.88,2935.42
  region net +5V: 3185.21,3115.21 3185.21,3090.21 3200.21,3110.64 3200.21,3124.79
  region net +5V: 3079.79,3089.9 3079.79,3114.9 3064.79,3107.4 3064.79,3097.4
  region net +3V3: 2152.29,2940.21 2152.29,2965.21 2137.29,2974.79 2137.29,2960.64
  region net +3V3: 2257.71,2964.9 2257.71,2939.9 2272.4,2947.4 2272.4,2957.4
  region net VBAT: 2604.94,2747.28 2579.94,2747.28 2587.44,2732.28 2597.44,2732.28
  region net VBAT: 2276.13,2732.72 2288.31,2710.88 2294.77,2730.1 2289.7,2739.18
  region net VBAT: 2285.06,2697.28 2260.06,2697.28 2267.56,2682.28 2277.56,2682.28
  region net VBAT: 3282.4,3017.28 3257.4,3017.28 3264.9,3002.28 3274.9,3002.28
  region net VBAT: 2369.9,2867.28 2344.9,2867.28 2352.4,2852.28 2362.4,2852.28
  region net EN: 3271.55,4914.95 3271.55,4939.95 3256.55,4932.41 3256.55,4922.41
  region net C3_1: 2154.94,2417.28 2129.94,2417.28 2137.44,2402.28 2147.44,2402.28
  region net C3_1: 2129.9,2452.72 2154.9,2452.72 2147.4,2467.72 2137.4,2467.72
  region net C3_2: 2210.06,2417.28 2185.06,2417.28 2192.56,2402.28 2202.56,2402.28
  region net C3_2: 2185.06,2452.72 2210.06,2452.72 2202.56,2467.72 2192.56,2467.72
  region net P+: 2735.1,2827.28 2710.1,2827.28 2717.6,2812.28 2727.6,2812.28
  region net C3_1: 2867.5,1980 2892.5,1980 2885,1985 2875,1985
  region net VBAT: 2215,1962.32 2232.68,1980 2216.77,1985.3 2209.7,1978.23
  region net +5V: 2543.47,3127.16 2543.47,3102.16 2558.47,3109.66 2558.47,3119.66
  region net +3V3: 2887.18,4073.9 2874.24,4086.84 2883.21,4089.95 2890.29,4082.87
  region net +3V3: 2425.76,4057.82 2412.82,4070.76 2409.71,4061.79 2416.79,4054.71
  region net BATT_ALERT: 2752.94,3048.16 2768.34,3038.26 2760.32,3033.25 2751.71,3038.79
  region net BATT_ALERT: 2370.85,3251.93 2389.15,3251.93 2385,3243.38 2375,3243.38
  region net VBAT: 2353.73,2755.78 2340.79,2768.73 2337.68,2759.75 2344.75,2752.68
  region net VBAT: 2346.3,2778.18 2363.94,2773.3 2362.4,2782.59 2352.4,2785.36
  region net VBAT: 3159.68,2918.67 3146.73,2905.73 3155.71,2902.62 3162.78,2909.69
  region net SDA: 2429.66,3162.46 2411.39,3163.65 2416.08,3171.91 2426.08,3171.26
  region net SDA: 2667.18,3056.1 2654.24,3043.16 2663.21,3040.05 2670.29,3047.13
  region net USB_4: 3223.99,3568.63 3210.55,3613.92 3194.65,3590 3197.62,3580
  region net +5V: 3258.09,3849.17 3258.08,3896.42 3277.2,3877.8 3277.2,3867.8
  region net U0TXD: 3084.58,4695.36 3037.83,4713.63 3047.6,4684.66 3057.76,4680.69
  region net U0RXD: 3184.58,4695.36 3137.83,4713.63 3147.6,4684.66 3157.76,4680.69
  region net +3V3: 2977.9,4153.4 3013.4,4117.9 3015.75,4148.68 3008.68,4155.75
  region net +3V3: 2957.87,4094.9 2957.87,4145.1 2934.44,4125 2934.44,4115
  region net AM: 2960.54,3992.77 2955.42,4042.71 2934.17,4020.35 2935.19,4010.35
  region net ECHO: 2307.9,3133.4 2343.4,3097.9 2345.75,3128.68 2338.68,3135.75
  region net TRIG: 2404.26,3132.97 2378.01,3090.19 2368.48,3119.45 2373.86,3128.21
Bottom Layer:
  region net +3V3: 2866.98,4083.86 2866.87,4065.56 2858.35,4069.76 2858.41,4079.76
  region net +3V3: 2435.45,4063.7 2429.94,4081.16 2439.27,4080 2442.42,4070
  region net BATT_ALERT: 2755.85,3058.07 2774.15,3058.07 2770,3066.62 2760,3066.62
  region net BATT_ALERT: 2392.18,3259.24 2379.24,3272.18 2388.21,3275.29 2395.29,3268.21
  region net VBAT: 2365.15,2767.2 2352.2,2780.14 2361.18,2783.25 2368.25,2776.18
  region net VBAT: 3157.76,2911.31 3139.66,2908.55 3145,2900.72 3155,2902.24
  region net VBAT: 2635.85,2700.63 2654.15,2700.63 2650,2705 2640,2705
  region net VBAT: 2653.09,2683.43 2653.05,2701.73 2661.6,2697.6 2661.63,2687.6
  region net SDA: 2431.74,3158.34 2421.84,3142.94 2431.21,3141.71 2436.75,3150.32
  region net SDA: 2642.96,3053.32 2658.51,3043.65 2650.59,3038.52 2641.87,3043.94

## Silkscreen, mask and mechanical layers (free items; w line width, h text height)
Top Overlay:
  lines w10 net S$22309: 2812.5,3157.5 2812.5,5112.5 1852.5,5112.5 1852.5,3162.5 2812.5,3162.5